# EAGLE board Advanced_Breakout_Schematic (EAGLE 7.2.0)
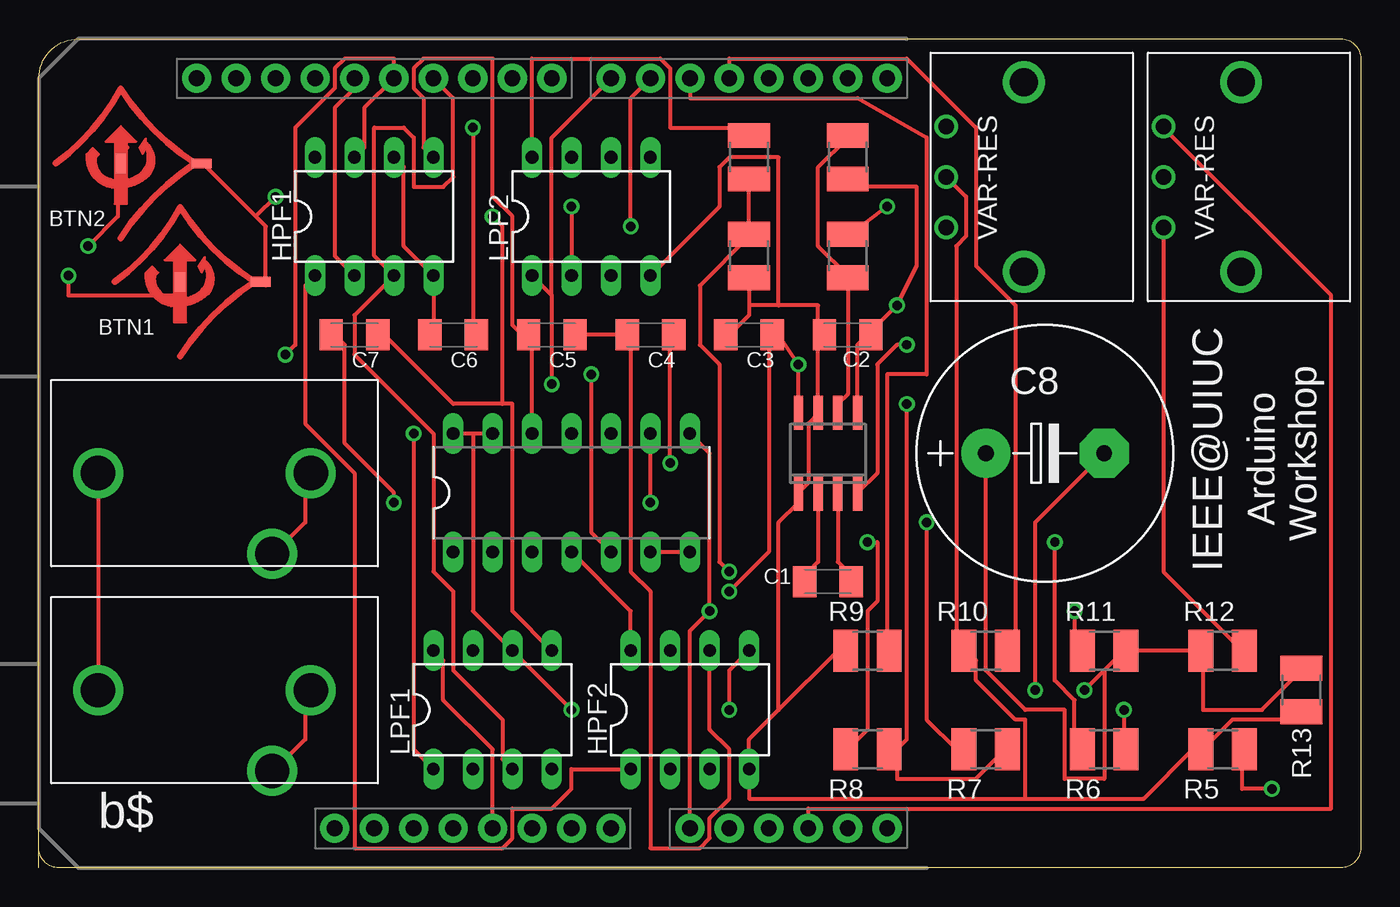
[diagram p0: board, top side]
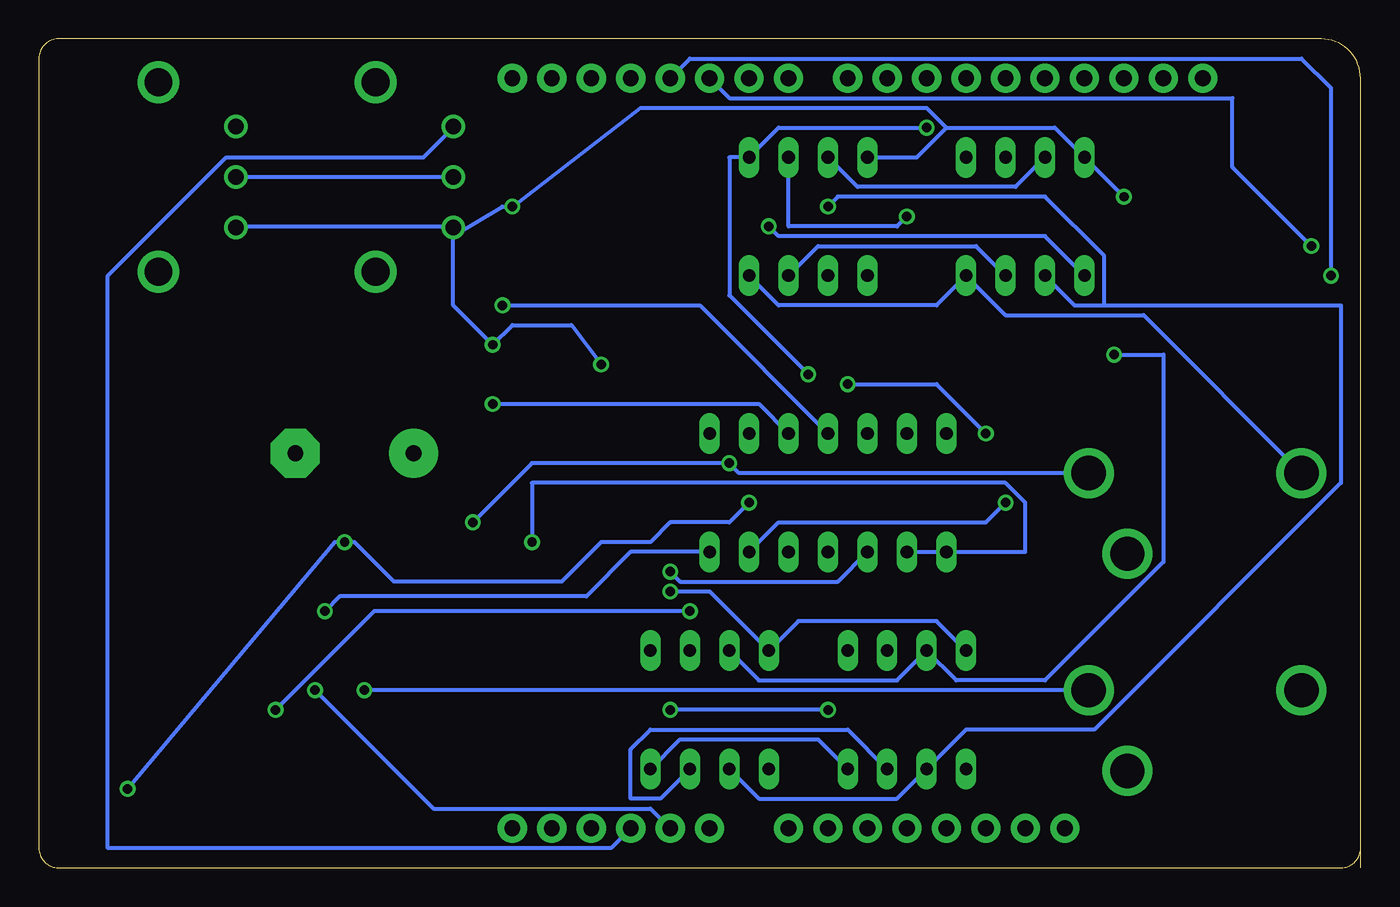
[diagram p1: board, bottom side, seen from below]

Size 85.09 x 53.34 mm. Coordinates in mm from the lower left corner, seen from the top.
Outline: 0,0 0,1.27
Outline: 0,1.27 0,50.8 arc-90 2.54,53.34 83.82,53.34 arc-90 85.09,52.07 85.09,1.27 arc-90 83.82,0 1.27,0 arc-90 0,1.27
Copper layers (1*16): Top 0.035mm / dielectric 1.5mm / Bottom 0.035mm
Design rules "default": minimum track width 10mil, minimum drill 24mil, track to track 8mil, track to pad 8mil, pad to pad 8mil, via to via 8mil, smd to smd 8mil, copper to edge 40mil, drill to drill 8mil, minimum pad ring 10mil, minimum via ring 8mil, stop-mask expansion 4mil, vias tented up to drill 0mil, thermal gap 10mil

## Footprints (pad centres in the part's own frame; a part is rotated, then mirrored left to right if it is on the bottom)
C1206K = smd 1.5 x 2: 1 -1.5,0; 2 1.5,0
E7,5-16 = drill 1.016 pad 3.15: + -3.81,0 | drill 1.016 pad 3.15 octagon: - 3.81,0
DIL08 = drill 0.813 long: 1 -3.81,-3.81; 2 -1.27,-3.81; 3 1.27,-3.81; 4 3.81,-3.81; 5 3.81,3.81; 6 1.27,3.81; 7 -1.27,3.81; 8 -3.81,3.81
UNO_R3_SHIELD_NOLABELS = drill 1.016 pad 1.88: 3.3V 50.8,26.67; 5V 50.8,29.21; A0 50.8,41.91; A1 50.8,44.45; A2 50.8,46.99; A3 50.8,49.53; A4 50.8,52.07; A5 50.8,54.61; AREF 2.54,15.24; D2 2.54,49.53; D3 2.54,46.99; D4 2.54,44.45; D5 2.54,41.91; D6 2.54,39.37; D7 2.54,36.83; D8 2.54,33.02; D9 2.54,30.48; D10 2.54,27.94; D11 2.54,25.4; D12 2.54,22.86; D13 2.54,20.32; GND@0 50.8,31.75; GND@1 50.8,34.29; GND@2 2.54,17.78; IOREF 50.8,21.59; NC 50.8,19.05; RES 50.8,24.13; RX 2.54,54.61; SCL 2.54,10.16; SDA 2.54,12.7; TX 2.54,52.07; VIN 50.8,36.83
R1210 = smd 1.6 x 2.7: 1 -1.4,0; 2 1.4,0
SO08 = smd 0.6 x 2.2: 1 -1.905,-2.6; 2 -0.635,-2.6; 3 0.635,-2.6; 4 1.905,-2.6; 5 1.905,2.6; 6 0.635,2.6; 7 -0.635,2.6; 8 -1.905,2.6
DIL14 = drill 0.813 long: 1 -7.62,-3.81; 2 -5.08,-3.81; 3 -2.54,-3.81; 4 0,-3.81; 5 2.54,-3.81; 6 5.08,-3.81; 7 7.62,-3.81; 8 7.62,3.81; 9 5.08,3.81; 10 2.54,3.81; 11 0,3.81; 12 -2.54,3.81; 13 -5.08,3.81; 14 -7.62,3.81
P120PK = drill 1.8: P$4 -6.1,5; P$5 6.1,5 | drill 1: PL -3.25,0; PM 0,0; PR 3.25,0
AUDIO_JACK = drill 2.2: RING 11.2,-5.2; SLEEVE 0,0; TIP 13.7,0
IEEE_LOGO_BUTTON = smd 0.635 x 1.27: P$1 0.2,-0.4 | smd 1.27 x 0.635: P$2 5.4,-0.4

## Placement (x,y rotation side)
C1  2.2u  [C1206K]  50.8,18.41 0 top
C2  22u  [C1206K]  52.07,34.29 0 top
C3  10u  [C1206K]  45.72,34.29 180 top
C4  1u  [C1206K]  39.37,34.29 180 top
C5  1u  [C1206K]  33.02,34.29 180 top
C6  1u  [C1206K]  26.67,34.29 180 top
C7  1u  [C1206K]  20.32,34.29 180 top
C8  10m  [E7,5-16]  64.77,26.67 0 top
HPF1  MCP4162-502E  [DIL08]  21.59,41.91 0 top
HPF2  MCP4162-502E  [DIL08]  41.91,10.16 0 top
J1  ARDUINO_R3_SHIELDNOLABELS  [UNO_R3_SHIELD_NOLABELS]  0,53.34 270 top
LPF1  MCP4162-502E  [DIL08]  29.21,10.16 0 top
LPF2  MCP4162-502E  [DIL08]  35.56,41.91 0 top
R1  100k  [R1210]  52.07,45.72 90 top
R2  100k  [R1210]  52.07,39.37 90 top
R3  100k  [R1210]  45.72,45.72 90 top
R4  100k  [R1210]  45.72,39.37 90 top
R5  10k  [R1210]  76.2,7.62 0 top
R6  10k  [R1210]  68.58,7.62 0 top
R7  10k  [R1210]  60.96,7.62 0 top
R8  10k  [R1210]  53.34,7.62 0 top
R9  10k  [R1210]  53.34,13.97 0 top
R10  10k  [R1210]  60.96,13.97 0 top
R11  1k  [R1210]  68.58,13.97 0 top
R12  1k  [R1210]  76.2,13.97 0 top
R13  4.7k  [R1210]  81.28,11.43 90 top
U$1  MAX1673  [SO08]  50.8,26.67 0 top
U$2  TLV974  [DIL14]  34.29,24.13 0 top
U$3  P120PK  [P120PK]  58.42,44.45 270 top
U$4  P120PK  [P120PK]  72.39,44.45 270 top
U$5  AUDIO_JACK  [AUDIO_JACK]  3.81,25.4 0 top
U$6  AUDIO_JACK  [AUDIO_JACK]  3.81,11.43 0 top
U$7  IEEE_LOGO_BUTTON  [IEEE_LOGO_BUTTON]  5.08,45.72 0 top
U$8  IEEE_LOGO_BUTTON  [IEEE_LOGO_BUTTON]  8.89,38.1 0 top

## Library data of the parts
C1-C8 R1-R13 = rcl
HPF1 HPF2 J1 LPF1 LPF2 U$1-U$8 = Workshop_Library

## Nets
+2V5: R8.1 U$2.1 U$2.2
+5V: C3.1 HPF1.8 HPF2.8 J1.5V LPF1.8 LPF2.8 R2.2 R3.2 R12.2 U$1.4 U$1.8 U$2.4 U$3.PR U$4.PR U$7.P$2 U$8.P$2
+VDD/2: R3.1 R4.2 U$2.3
-5V: C2.2 R1.1 U$1.5 U$2.11
BIASED_INPUT: J1.A0 R6.2 U$2.8
BIASED_OUTPUT: C8.+ J1.A1 R11.2 R12.1 R13.2
BTN1: J1.D4 R10.2 U$8.P$1
BTN2: J1.D5 R9.2 U$7.P$1
CAP+: C1.1 U$1.2
CAP-: C1.2 U$1.3
FILTER_OUT: C7.2 R11.1 U$2.6 U$2.7
GND: C2.1 C3.2 C6.2 HPF1.4 HPF1.6 HPF2.4 LPF1.4 LPF2.4 R4.1 R5.1 R9.1 R10.1 R13.1 U$1.1 U$1.7 U$3.PM U$4.PM U$5.SLEEVE U$6.SLEEVE
INPUT: C4.1 R7.1 U$5.RING U$5.TIP
INV_FB: R1.2 R2.1 U$1.6
MID_FILTER: HPF2.5 LPF1.6 U$2.13 U$2.14
MISO: HPF1.7 HPF2.7 J1.D12 LPF1.7 LPF2.7
MOSI: HPF1.3 HPF2.3 J1.D11 LPF1.3 LPF2.3
N$1: R5.2 R6.1 U$2.9
N$2: C5.2 HPF1.5 U$2.12
N$3: R7.2 R8.2 U$2.10
N$4: C4.2 C5.1 HPF2.6
N$7: C6.1 LPF2.5 U$2.5
N$9: C7.1 LPF1.5 LPF2.6
OUTPUT: C8.- U$6.RING U$6.TIP
POT1_WIPER: J1.A2 U$3.PL
POT2_WIPER: J1.A3 U$4.PL
SCLK: HPF1.2 HPF2.2 J1.D13 LPF1.2 LPF2.2
SS_HPF: HPF1.1 HPF2.1 J1.D6
SS_LPF: J1.D7 LPF1.1 LPF2.1

## Tracks (layer width: path | path; a pad name or v marks a point on that pad's centre or on a via)
+2V5  (via drill 0.61)
  Top 0.254: v53.34,20.95 53.98,20.95 53.98,17.14 53.34,16.51 53.34,8.89 52.07,7.62 R8.1
  Bottom 0.254: U$2.2 U$2.1 21.59,20.32 21.59,23.5 22.86,24.77 53.34,24.77 v53.34,20.95
+5V  (via drill 0.61)
  Top 0.254: 13.97,41.91 14.61,41.27 14.61,37.47 U$8.P$2 | 13.97,41.91 10.79,45.09 U$7.P$2 | LPF2.8 31.75,52.07 40.01,52.07 40.64,51.44 40.64,47.62 45.72,47.62 R3.2 | v15.24,43.18 13.97,41.91 | U$2.4 38.1,16.51 HPF2.8 | LPF1.8 26.04,13.34 26.04,10.79 29.21,7.62 J1.5V | U$1.8 v48.9,32.38 47.62,34.29 C3.1 46.99,34.29 46.99,20.32 v44.45,17.78 | v55.88,33.66 55.24,33.66 53.98,32.38 53.98,25.4 52.7,24.13 U$1.4 | v54.61,42.55 52.07,40.64 R2.2 | U$4.PR 72.39,19.05 77.47,13.97 R12.2
  Bottom 0.254: 26.67,47.62 19.68,47.62 HPF1.8 v15.24,43.18 | 26.67,47.62 28.57,45.72 LPF2.8 | LPF1.8 27.3,15.88 36.2,15.88 HPF2.8 41.91,17.78 v44.45,17.78 | 58.42,40.64 55.24,42.55 v54.61,42.55 46.35,48.9 27.94,48.9 26.67,47.62 | 58.42,40.64 U$3.PR 58.42,41.27 72.39,41.27 U$4.PR | v48.9,32.38 50.8,34.92 54.61,34.92 v55.88,33.66 58.42,36.2 58.42,40.64
+VDD/2  (via drill 0.61)
  Top 0.254: v44.45,19.05 43.81,19.68 43.81,32.38 42.55,33.66 42.55,37.47 45.72,40.64 R4.2 R3.1
  Bottom 0.254: U$2.3 33.66,18.41 43.81,18.41 v44.45,19.05
-5V  (via drill 0.61)
  Top 0.254: 53.34,34.29 52.7,33.66 U$1.5 | 53.34,34.29 v55.24,36.2 56.52,38.73 56.52,43.81 52.07,43.81 R1.1 | 53.34,34.29 C2.2
  Bottom 0.254: U$2.11 42.55,36.2 v55.24,36.2
BIASED_INPUT  (via drill 0.61)
  Top 0.254: U$2.8 43.18,26.67 v43.18,16.51 41.91,15.24 J1.A0 | v69.85,10.16 69.85,7.62 R6.2
  Bottom 0.254: v69.85,10.16 63.5,16.51 v43.18,16.51
BIASED_OUTPUT  (via drill 0.61)
  Top 0.254: R13.2 81.28,12.7 78.74,10.16 74.93,10.16 74.93,13.97 R12.1 R11.2 69.85,13.97 68.58,12.7 | 68.58,12.7 v67.31,11.43 | C8.+ 60.96,12.7 63.5,10.16 66.04,10.16 66.04,5.71 68.58,5.71 68.58,12.7
  Bottom 0.254: J1.A1 45.72,3.81 59.69,3.81 v67.31,11.43
BTN1  (via drill 0.61)
  Top 0.254: 8.89,38.1 U$8.P$1 9.09,37.03 8.89,36.83 1.91,36.83 v1.91,38.1 | J1.D4 44.45,52.07 55.88,52.07 60.33,47.62 60.33,38.73 62.87,36.2 62.87,13.97 R10.2
  Bottom 0.254: J1.D4 43.18,52.07 3.81,52.07 1.91,50.16 v1.91,38.1
BTN2  (via drill 0.61)
  Top 0.254: 5.08,45.72 U$7.P$1 | J1.D5 41.91,49.53 52.7,49.53 57.15,46.99 57.15,31.75 54.61,31.75 54.61,13.97 R9.2 | 5.71,46.35 5.08,45.72 | 5.08,45.72 5.08,41.91 v3.17,40.01
  Bottom 0.254: J1.D5 40.64,49.53 8.26,49.53 8.26,45.09 v3.17,40.01
CAP+
  Top 0.254: U$1.2 50.16,19.68 49.53,19.05 C1.1
CAP-
  Top 0.254: U$1.3 51.44,19.68 52.07,19.05 C1.2
FILTER_OUT  (via drill 0.61)
  Top 0.254: v22.86,23.5 22.86,24.13 19.68,27.3 19.68,33.66 19.05,34.29 C7.2 | U$2.6 U$2.7 | v66.67,16.51 66.67,13.97 R11.1
  Bottom 0.254: v22.86,23.5 24.13,22.23 37.47,22.23 U$2.6 | v66.67,16.51 65.72,17.46 49.85,17.46 46.99,20.32 U$2.7
GND
  Top 0.254: U$5.SLEEVE U$6.SLEEVE | C6.2 25.4,34.29 HPF1.4 23.5,40.01 23.5,45.09 HPF1.6 | U$3.PM 59.69,43.18 59.69,40.64 59.05,40.01 59.05,13.97 R10.1 59.69,13.97 60.33,13.34 60.33,12.06 62.87,9.53 63.5,9.53 63.5,4.45 | R4.1 45.72,36.2 | 45.72,36.2 45.72,35.56 44.45,34.29 C3.2 | 50.16,34.29 U$1.7 50.16,29.21 49.53,28.57 49.53,24.77 48.9,24.13 U$1.1 48.9,23.5 47.62,22.23 47.62,10.16 | 47.62,36.2 50.16,36.2 50.16,34.29 | 47.62,36.2 45.72,36.2 | 50.16,34.29 C2.1 | R13.1 81.28,9.53 76.83,9.53 74.93,7.62 R5.1 74.3,7.62 71.12,4.45 63.5,4.45 | 47.62,10.16 45.72,8.26 HPF2.4 45.72,4.45 63.5,4.45 | 47.62,10.16 51.44,13.97 R9.1 | LPF2.4 43.81,42.55 43.81,45.09 44.45,45.72 47.62,45.72 47.62,36.2
  Bottom 0.254: LPF2.4 37.47,36.2 27.3,36.2 HPF1.4 22.86,35.56 13.97,35.56 U$5.SLEEVE | U$3.PM U$4.PM | LPF1.4 34.92,8.26 43.81,8.26 HPF2.4
INPUT  (via drill 0.61)
  Top 0.254: v40.64,26.04 40.64,34.29 C4.1 | v57.15,22.23 57.15,9.53 59.05,7.62 R7.1 | U$5.RING 15.24,20.32 17.14,22.23 17.14,25.4 U$5.TIP
  Bottom 0.254: U$5.TIP 40.01,25.4 v40.64,26.04 53.34,26.04 v57.15,22.23
INV_FB
  Top 0.254: U$1.6 51.44,29.84 52.07,30.48 R2.1 52.07,38.1 50.16,40.01 50.16,45.09 52.07,46.99 R1.2
MID_FILTER  (via drill 0.61)
  Top 0.254: U$2.13 27.94,27.94 | 27.94,27.94 U$2.14 | 27.94,27.94 27.94,16.51 LPF1.6 v34.29,10.16 | HPF2.5 44.45,12.7 v44.45,10.16
  Bottom 0.254: v34.29,10.16 v44.45,10.16
MISO  (via drill 0.61)
  Top 0.254: HPF1.7 20.95,46.35 20.95,48.9 J1.D12 22.86,52.07 19.68,52.07 19.05,51.44 19.05,50.16 16.51,47.62 16.51,33.66 v15.88,33.02
  Bottom 0.254: HPF2.7 38.73,12.06 29.84,12.06 LPF1.7 26.04,12.06 20.32,12.06 12.7,19.68 12.7,33.02 v15.88,33.02 | LPF2.7 32.38,43.81 22.23,43.81 HPF1.7
MOSI
  Top 0.254: J1.D11 26.67,49.53 26.67,44.45 26.04,43.81 24.13,43.81 24.13,46.99 23.5,47.62 21.59,47.62 21.59,39.37 HPF1.3 20.32,35.56 20.32,33.02 25.4,27.94 25.4,19.05 26.67,17.78 26.67,12.7 29.84,9.53 29.84,6.99 LPF1.3
  Bottom 0.254: LPF1.3 33.02,8.89 45.72,8.89 46.99,7.62 46.99,4.45 45.09,4.45 HPF2.3 | HPF1.3 24.77,40.01 34.92,40.01 LPF2.3
N$1  (via drill 0.61)
  Top 0.254: v39.37,23.5 U$2.9 | v65.41,20.95 65.41,12.06 66.67,10.79 66.67,7.62 R6.1 | v79.38,5.08 77.47,5.08 77.47,7.62 R5.2
  Bottom 0.254: v39.37,23.5 40.64,22.23 44.45,22.23 45.72,20.95 48.9,20.95 51.44,18.41 62.23,18.41 64.77,20.95 v65.41,20.95 66.04,20.95 v79.38,5.08
N$2
  Top 0.254: U$2.12 31.75,34.29 C5.2 31.11,34.29 30.48,34.92 30.48,41.91 29.21,43.18 29.21,52.07 24.77,52.07 24.13,51.44 24.13,50.16 24.77,49.53 24.77,46.35 HPF1.5
N$3  (via drill 0.61)
  Top 0.254: v55.88,29.84 55.88,8.26 55.24,7.62 | 55.24,7.62 55.24,5.71 60.33,5.71 62.23,7.62 R7.2 | 55.24,7.62 R8.2
  Bottom 0.254: U$2.10 38.73,29.84 v55.88,29.84
N$4
  Top 0.254: C5.1 C4.2 38.1,34.29 38.1,19.05 39.37,17.78 39.37,1.27 42.55,1.27 43.18,1.91 43.18,3.17 44.45,4.45 44.45,7.62 43.18,8.89 HPF2.6
N$7  (via drill 0.61)
  Top 0.254: v27.94,47.62 27.94,34.29 C6.1 | U$2.5 35.56,21.59 v35.56,31.75
  Bottom 0.254: v27.94,47.62 37.47,47.62 LPF2.5 40.64,45.72 40.64,36.83 v35.56,31.75
N$9  (via drill 0.61)
  Top 0.254: 29.84,29.84 30.48,29.84 30.48,16.51 LPF1.5 | 29.84,29.84 26.67,29.84 22.23,34.29 C7.1 | v29.21,41.91 29.84,41.27 29.84,29.84
  Bottom 0.254: LPF2.6 36.83,41.27 29.84,41.27 v29.21,41.91
OUTPUT  (via drill 0.61)
  Top 0.254: C8.- 64.14,22.23 v64.14,11.43 | U$6.RING 15.24,6.35 17.14,8.26 17.14,11.43 U$6.TIP
  Bottom 0.254: U$6.TIP v64.14,11.43
POT1_WIPER
  Bottom 0.254: J1.A2 48.26,1.27 80.64,1.27 80.64,38.1 73.03,45.72 60.33,45.72 58.42,47.62 U$3.PL
POT2_WIPER
  Top 0.254: J1.A3 49.53,3.81 83.19,3.81 83.19,36.83 72.39,47.62 U$4.PL
SCLK  (via drill 0.61)
  Top 0.254: HPF1.2 19.05,39.37 19.05,48.9 20.32,50.16 J1.D13 | v34.29,42.55 LPF2.2
  Bottom 0.254: HPF2.2 38.73,4.45 29.84,4.45 LPF1.2 25.4,8.89 17.14,8.89 1.27,24.77 1.27,36.2 16.51,36.2 | v34.29,42.55 33.66,43.18 20.32,43.18 16.51,39.37 16.51,36.2 | 16.51,36.2 18.41,36.2 HPF1.2
SS_HPF  (via drill 0.61)
  Top 0.254: HPF2.1 34.29,6.35 34.29,5.08 33.02,3.81 30.48,3.81 30.48,1.91 29.84,1.27 20.32,1.27 20.32,25.4 17.14,28.57 17.14,37.47 HPF1.1 | J1.D6 38.1,49.53 v38.1,41.27
  Bottom 0.254: v38.1,41.27 37.47,40.64 20.32,40.64 HPF1.1
SS_LPF  (via drill 0.61)
  Top 0.254: LPF1.1 24.13,7.62 v24.13,27.94 | 33.02,36.83 v33.02,31.11 | LPF2.1 33.02,36.83 | J1.D7 33.02,46.99 33.02,36.83
  Bottom 0.254: v24.13,27.94 27.3,31.11 v33.02,31.11

## Text on the board
tNames: BTN2 | BTN1 | Arduino / Workshop | IEEE@UIUC | b$